# Altium PCB hdmi_wing.PcbDoc
Units mil, origin at the board's own origin, x right, y up, seen from the top; angles counter-clockwise.
Board outline 1116.93 x 800 mil, 2 copper layers (Top Layer, Bottom Layer); 2 components, 11 nets, 35 pads, 6 vias.
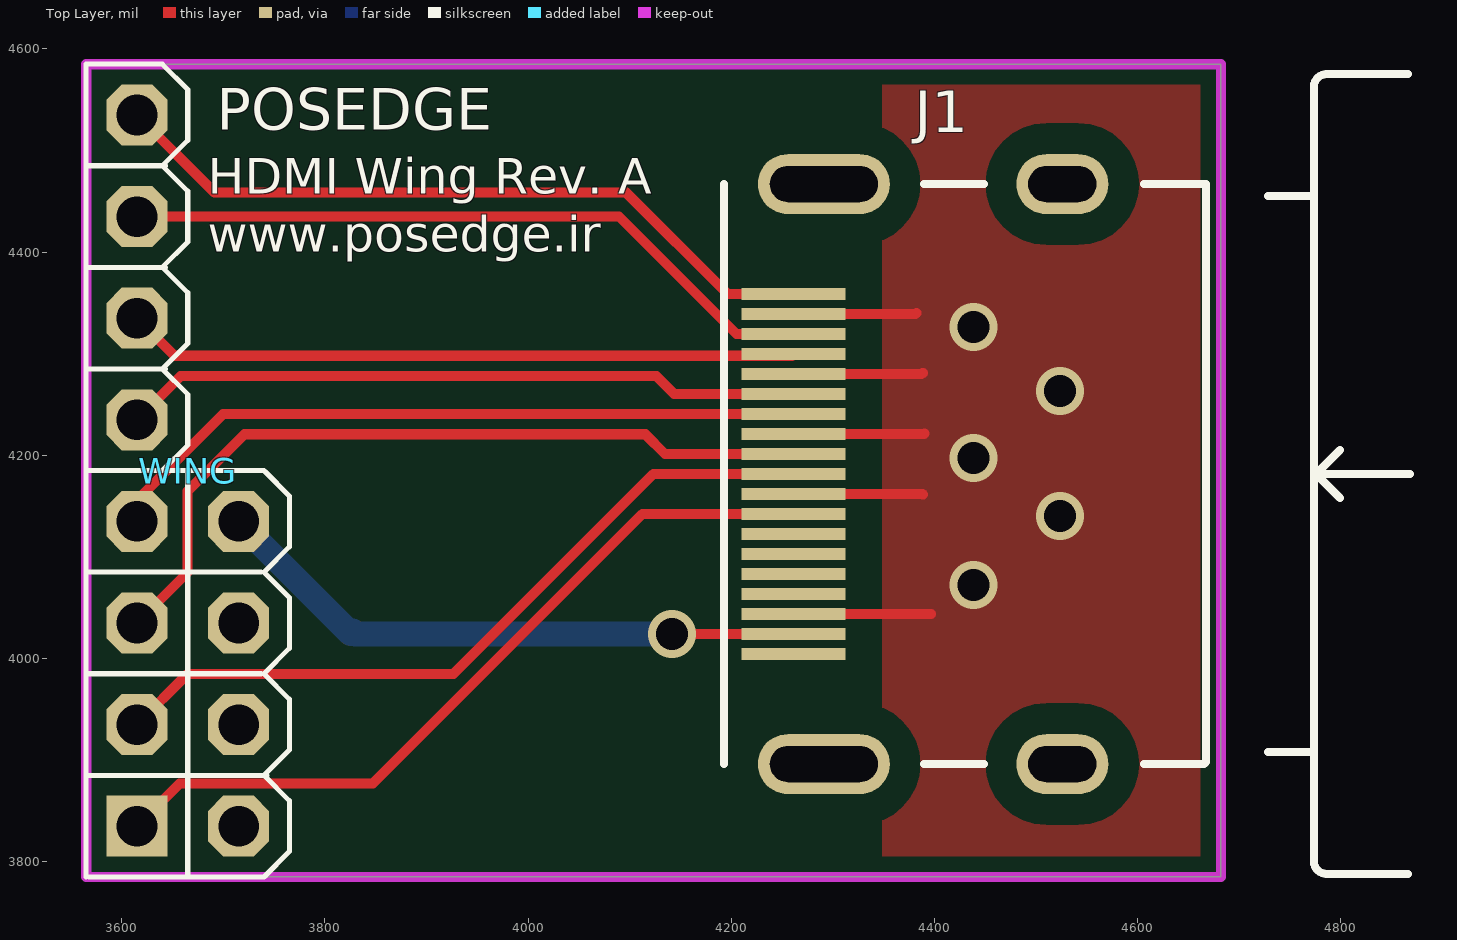
[diagram p0: Top Layer view]
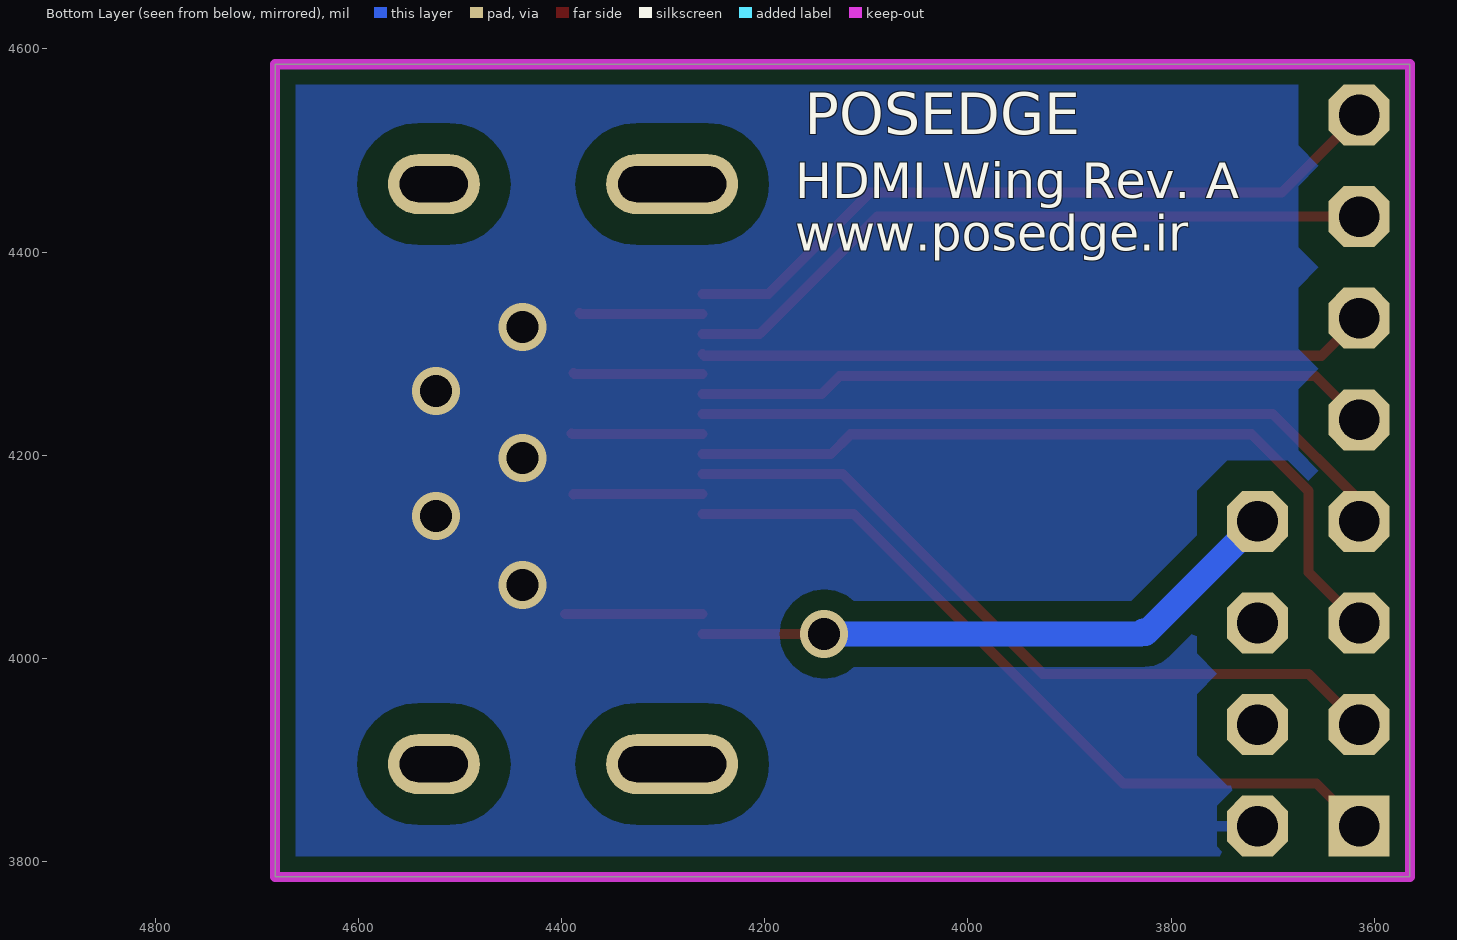
[diagram p1: Bottom Layer view, seen from below]

## Layer stack, top to bottom
Top Solder: solder mask 0.4, Solder Resist, Dk 3.5
Top Layer: signal copper 1.4
Dielectric1: dielectric 12.6, FR-4, Dk 4.8
Bottom Layer: signal copper 1.4
Bottom Solder: solder mask 0.4, Solder Resist, Dk 3.5

## Board outline
3565,3785 4681.93,3785 4681.93,4585 3565,4585

## Design rules (kind name [scope] priority, off if disabled: settings)
Clearance Clearance_Poly_to_con [InNet('GND','VCC3V3') and InPoly vs InComponent('P*','J*','W*','X*')] p1: gap=30
Clearance Clearance_poly_to_power [InNet('GND','VCC3V3') and InPoly vs (InNet('VCC3V3') OR InNet('VCC5V0'))] p2: gap=20
Clearance Clearance_poly_to_all [InNet('GND','VCC3V3') and InPoly] p3: gap=15
Clearance Clearance_all_to_all [All] p4: gap=7
DiffPairsRouting [All] p1: maxlimit=50 minlimit=10 mostfreqgap=10 toplayer_minwidth=10 toplayer_maxwidth=15 toplayer_prefwidth=10 bottomlayer_minwidth=10 bottomlayer_maxwidth=15 bottomlayer_prefwidth=10 maxuncoupledlength=500
HoleSize [All] p1: absolutevalues=TRUE maxlimit=150 minlimit=1 maxpercent=80.000 minpercent=20.000
MinimumSolderMaskSliver [All] p1: minsoldermaskwidth=1
PolygonConnect PolygonConnect_via [IsVia] p1: connectstyle=Direct reliefconductorwidth=10 reliefentries=4 polygonreliefangle="90 Angle" airgapwidth=10
PolygonConnect PolygonConnect_GND [InNet('GND')] p2: connectstyle=Relief reliefconductorwidth=10 reliefentries=4 polygonreliefangle="90 Angle" airgapwidth=10
PolygonConnect PolygonConnect_VCC3V3 [InNet('VCC3V3')] p3: connectstyle=Relief reliefconductorwidth=10 reliefentries=4 polygonreliefangle="90 Angle" airgapwidth=10
RoutingCorners RoutingCorners_1 [OnLayer('Top Overlay')] p1: cornerstyle=90-Degree minsetback=100 maxsetback=100
RoutingCorners [All] p2: cornerstyle=45-Degree minsetback=100 maxsetback=100
RoutingVias [All] p1: holewidth=19.68 width=31.5 viastyle="Through Hole" minholewidth=11.81 minwidth=19.68 maxholewidth=31.5 maxwidth=47.24
SilkToSilkClearance [All] p1: silktosilkclearance=1
SilkToSolderMaskClearance [IsPad] p1: minsilkscreentomaskgap=2 clearancetoexposedcopper=TRUE
SolderMaskExpansion [All] p1: expansion=4
ViasUnderSMD [All] p1: allowed=FALSE
Width [All] p1: maxlimit=75 minlimit=10 preferedwidth=10 minimp=50.000000 maximp=50.000000 favimp=50.000000
24 further rules are at their usual default settings.

## Classes and differential pairs
differential pair TMDS_CLK: +TMDS_CLK_P -TMDS_CLK_N
differential pair TMDS_D0: +TMDS_D0_P -TMDS_D0_N
differential pair TMDS_D1: +TMDS_D1_P -TMDS_D1_N
differential pair TMDS_D2: +TMDS_D2_P -TMDS_D2_N

## Components (designator, comment, footprint, x,y, rotation, side; value= is the part's Value field where it differs from the comment)
J1 "47151-0001" HDMI_S_RA_SMD 4393.46,4181.61 r0 top
WING "WING8" WINGSIDE_8BIT 3565,4585 r270 top locked

## Footprints (in the part's own frame and the unit in brackets; to place one, negate y for a bottom-side part, rotate by r counter-clockwise, add the part's x,y. Pads: shape width x height; smd on the part's side, far side on the other; paste and mask are expansions set on the pad)
HDMI_S_RA_SMD [mm] "HDMI RIGHT ANGLE HEADER"
  rect 2.6x0.3 smd mask+0.025: 1(-3.36,4.5) 2(-3.36,4) 3(-3.36,3.5) 4(-3.36,3) 5(-3.36,2.5) 6(-3.36,2) 7(-3.36,1.5) 8(-3.36,1) 9(-3.36,0.5) 10(-3.36,0) 11(-3.36,-0.5) 12(-3.36,-1) 13(-3.36,-1.5) 14(-3.36,-2) 15(-3.36,-2.5) 16(-3.36,-3) 17(-3.36,-3.5) 18(-3.36,-4) 19(-3.36,-4.5)
  oval 3.3x1.5 hole 0.9 slot 2.7 at 0 deg: MTG1(-2.6,7.25) MTG3(-2.6,-7.25)
  oval 2.3x1.5 hole 0.9 slot 1.7 at 0 deg: MTG2(3.36,7.25) MTG4(3.36,-7.25)
  silkscreen extent -5.1,-10 12.05,10, body extent -4.2,-7.5 7.95,7.5, height 6.28
WINGSIDE_8BIT [mil]
  rect 60x60 hole 40: 0(750,50)
  oct 60x60 hole 40: 1(650,50) 2(550,50) 2V5@2(650,150) 3(450,50) 3V3@2(550,150) 4(350,50) 5(250,50) 5V@2(450,150) 6(150,50) 7(50,50) GND@2(750,150)
  silkscreen extent 0,0 800,200

## Part data
J1: "CONN RCPT 19POS HDMI RT ANG SMD"

## Via types
v1: diameter 47.24, hole 31.5, Top Layer to Bottom Layer, tented both sides, 6 vias

## Nets (pads, with @x,y where several pads share a name; then routed paths per layer and width w, separated by ;. In a path a pad name is that pad's centre, name@x,y a point inside that pad or via, vN(x,y) a via of type N, cw(c..) or ccw(c..) an arc to the next point about the centre after c; other vN are vias at no path point)
GND: J1.2 J1.5 J1.8 J1.11 J1.17 WING.GND@2 | length 640.6
  Top Layer w10: J1.17 4396.26,4043.82 4396.3,4043.78 ; J1.11 4388.03,4161.93 4388.39,4161.57 ; J1.8 4389.76,4220.98 4390.12,4221.34 ; J1.5 4387.32,4280.04 4388.39,4281.1 ; J1.2 4381.3,4339.09 4382.2,4340
  other v1: 4438.27,4072.52 4523.5,4140.08 4438.27,4197.56 4523.5,4263.39 4438.27,4326.22
TMDS_CLK_N: J1.12 WING.0 | length 773.4
  Top Layer w10: WING.0 3657,3877 3847.2,3877 4112.44,4142.24 J1.12
TMDS_CLK_P: J1.10 WING.1 | length 748.3
  Top Layer w10: WING.1 3664.88,3984.88 3926.5,3984.88 4123.23,4181.61 J1.10
TMDS_D0_N: J1.9 WING.2 | length 778
  Top Layer w10: WING.2 3664.67,4084.67 3664.67,4164.59 3720.83,4220.75 4115.31,4220.75 4134.76,4201.3 J1.9
TMDS_D0_P: J1.7 WING.3 | length 702.2
  Top Layer w10: WING.3 3615,4155.87 3699.88,4240.75 4193.84,4240.75 4193.92,4240.67 J1.7
TMDS_D1_N: J1.6 WING.4 | length 671.4
  Top Layer w10: WING.4 3658.07,4278.07 4126.1,4278.07 4143.82,4260.35 J1.6
TMDS_D1_P: J1.4 WING.5 | length 662.3
  Top Layer w10: WING.5 3651.93,4298.07 4251.75,4298.07 4251.87,4297.95 4259.4,4297.95 J1.4
TMDS_D2_N: J1.3 WING.6 | length 694.1
  Top Layer w10: WING.6 4089.41,4435 4205,4319.41 J1.3
TMDS_D2_P: J1.1 WING.7 | length 719.2
  Top Layer w10: WING.7 3691.46,4458.54 4096.69,4458.54 4196.46,4358.78 J1.1
VCC3V3: WING.3V3@2
VCC5V0: J1.18 WING.5V@2 | length 593.8
  Top Layer w10: v1(4141.5,4024.13) J1.18
  Bottom Layer w25: 3715,4135 3825.28,4024.72 3827.36,4026.81 3830.04,4024.13 v1(4141.5,4024.13)
pads on no net: J1.13 J1.14 J1.15 J1.16 J1.19 J1.MTG1 J1.MTG2 J1.MTG3 J1.MTG4 WING.2V5@2

## Polygon pours and split planes (outlines as drawn)
GND on Top Layer "Top Layer-No Net" (solid, remove dead copper, pour order 4): 3564.88,3788.74 4348.39,3785 4348.39,4180.79 4348.39,4584.61 4428.03,4584.61 4681.93,4585 4681.93,4180.79 4677.76,3789.17
GND on Bottom Layer "Top Layer-No Net" (solid, remove dead copper, pour order 6): 3565.51,4584.45 3566.3,4585.24 4682.05,4585.24 4682.05,3786.1 4681.65,3785.71 4680.87,3784.92 3565.32,3784.92

## Keep-outs
Keep-Out Layer:
  the board outline again, w10

## Silkscreen, mask and mechanical layers (free items; w line width, h text height)
Top Overlay:
  text "POSEDGE" at 3693.62,4506.54 h70
  text "HDMI Wing Rev. A" at 3684.45,4445.63 h60
  text "www.posedge.ir" at 3684.45,4388.5 h60
Bottom Overlay:
  text "POSEDGE" at 4160.55,4502.28 h70
  text "HDMI Wing Rev. A" at 4169.72,4441.38 h60
  text "www.posedge.ir" at 4169.72,4389.72 h60

## Dimensions
3565,3770 to 4681.93,3785 on Mechanical 1
4681.93,4585 to 4681.93,3785 on Mechanical 1